# Altium PCB CalcPCB_Project.PcbDoc
Units mil, origin at the board's own origin, x right, y up, seen from the top; angles counter-clockwise.
Board outline 3071.38 x 4608.28 mil, 2 copper layers (Top Layer, Bottom Layer); 35 components, 37 nets, 160 pads, 80 vias.
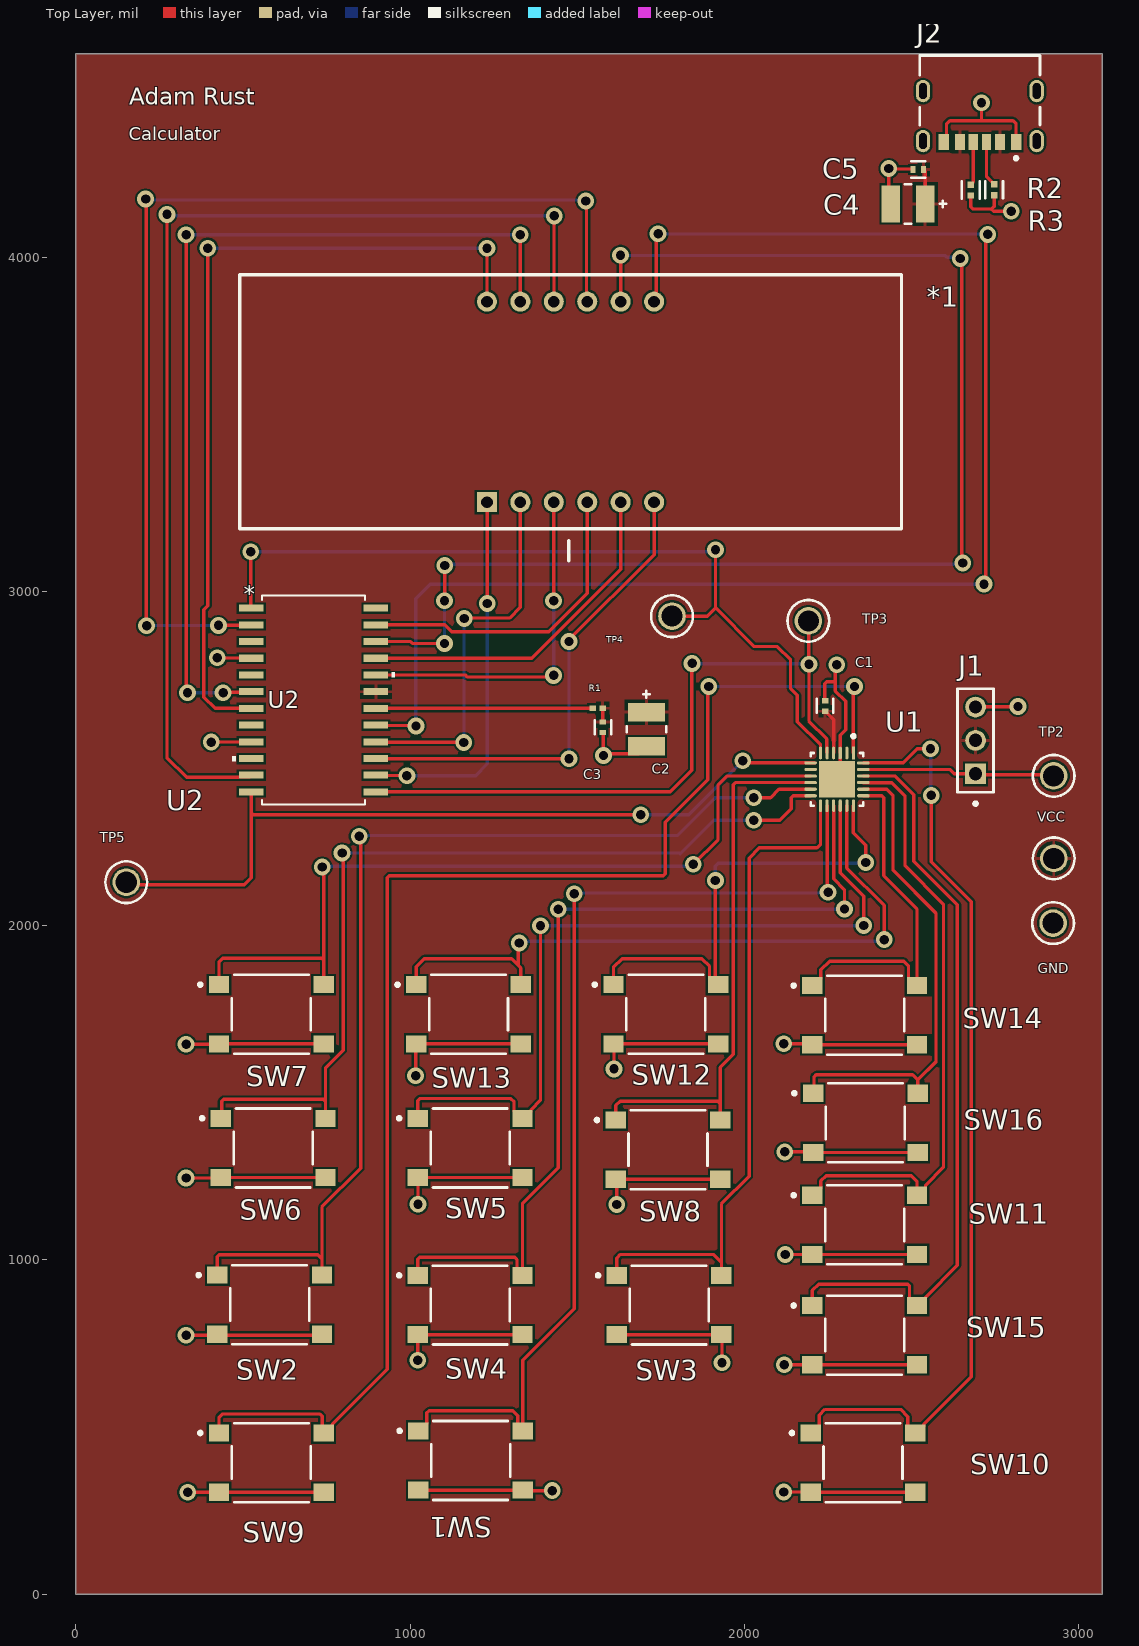
[diagram p0: Top Layer view]
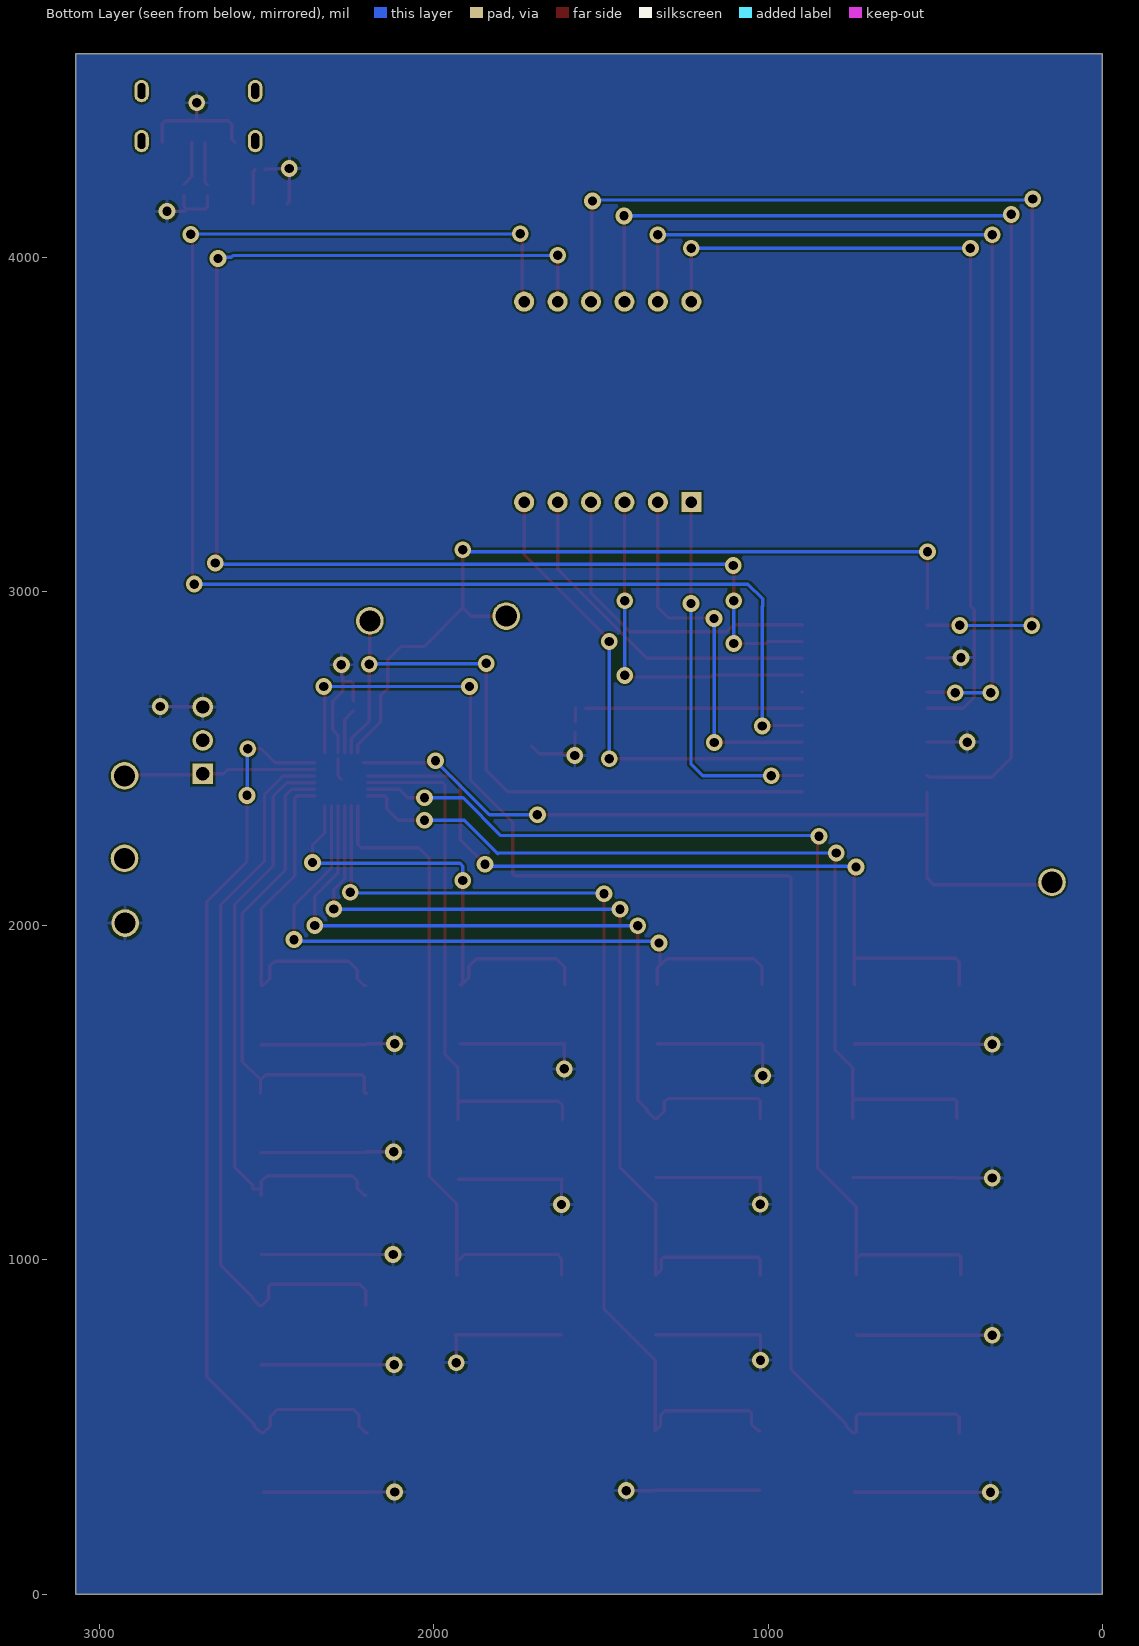
[diagram p1: Bottom Layer view, seen from below]
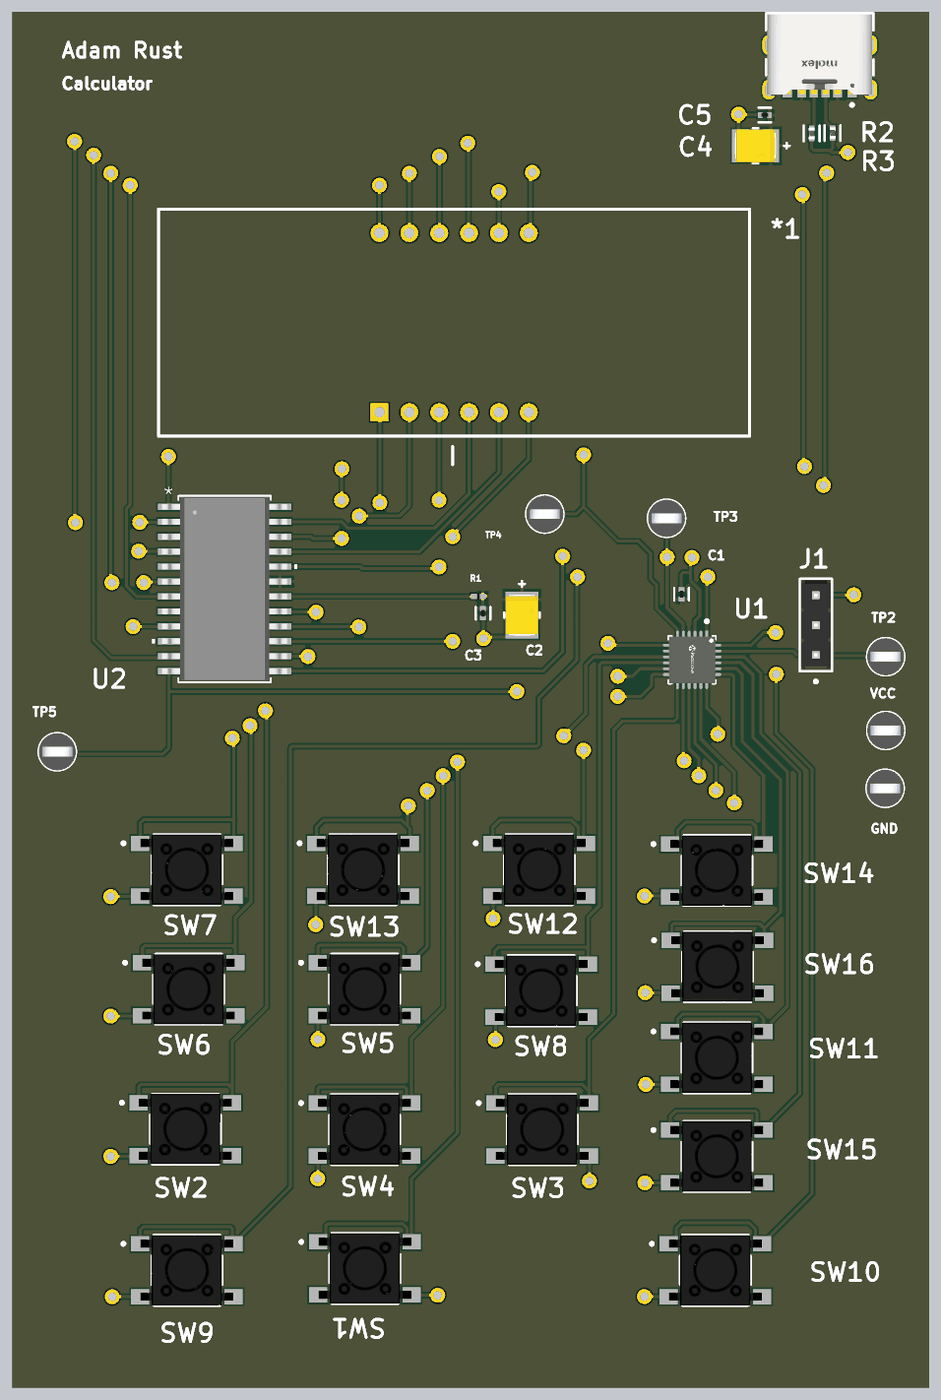
[diagram p2: 3D render of the assembled board from above, using the file's embedded part models]

## Layer stack, top to bottom
Top Solder: solder mask 0.4, Solder Resist, Dk 3.5
Top Layer: signal copper 1.4
Dielectric 1: dielectric 12.6, FR-4, Dk 4.8
Bottom Layer: signal copper 1.4
Bottom Solder: solder mask 0.4, Solder Resist, Dk 3.5

## Board outline
0,0 0,4608.28 3071.38,4608.28 3071.38,0

## Design rules (kind name [scope] priority, off if disabled: settings)
Clearance [All] p1: gap=6 ignorepadtopadclearanceinfootprint=FALSE
MinimumSolderMaskSliver [All] p1: minsoldermaskwidth=4
PolygonConnect [All] p1: connectstyle=Relief reliefconductorwidth=10 reliefentries=4 polygonreliefangle="90 Angle" airgapwidth=10
RoutingVias [All] p1: holewidth=28 width=50 viastyle="Through Hole" minholewidth=28 minwidth=50 maxholewidth=28 maxwidth=50
SilkToSolderMaskClearance [IsPad] p1: minsilkscreentomaskgap=4 clearancetoexposedcopper=TRUE
SolderMaskExpansion [All] p1: expansion=4 istentingtop=FALSE
SupplyNets "Schematic Supply Nets" [InNet('GND')] p1: voltage=0.000
Width [All] p1: maxlimit=10 minlimit=10 preferedwidth=10
28 further rules are at their usual default settings.

## Classes and differential pairs
component class MAX_7SEG_USBC: *1 C2 C3 C4 C5 J2 R1 R2 R3 U2
component class Calc_Schem: C1 GND J1 SW1 SW2 SW3 SW4 SW5 SW6 SW7 SW8 SW9 SW10 SW11 SW12 SW13 SW14 SW15 SW16 TP2 TP3 TP4 TP5 U1 VCC

## Components (designator, comment, footprint, x,y, rotation, side; value= is the part's Value field where it differs from the comment)
*1 "7SEG_4DIGIT" PCBComponent_1 1230,3266.93 r0 top
C1 "GRM155R71C104KA88D" FP-GRM15-MFG 2241.79,2657.39 r90 top value=0.10μF
C2 "TAJB106K010RNJ" FP-TAJB-MFG 1707.08,2587.74 r90 top
C3 "GRM155R71C104KA88D" FP-GRM15-MFG 1576.8,2593.78 r270 top value=0.10μF
C4 "TAJB106K010RNJ" FP-TAJB-MFG 2489.59,4159.2 r0 top
C5 "GRM155R71C104KA88D" FP-GRM15-MFG 2520.48,4262.14 r0 top value=0.10μF
GND "BTN" KSTN-5011_V 2923.7,2007.73 r0 top (schematic designator TP6)
J1 "22-28-4030" FP-22-28-4030-MFG 2691.59,2554.12 r90 top
J2 "217175-0001" FP-217175-0001-MFG 2704.6,4463.27 r180 top
R1 "RC0402FR-0710KL" RESC1005X40X25LL05T10 1561.37,2650.42 r0 top
R2 "5.1K" FP-RN73R1E-IPC_C 2747.44,4201.58 r270 top
R3 "5.1K" FP-RN73R1E-IPC_C 2677.46,4200.66 r270 top
SW1 "PTS645SM43SMTR92LFS" FP-PTS645SM43SMTR92LFS-MFG 1181.1,400 r0 top locked
SW2 "PTS645SM43SMTR92LFS" FP-PTS645SM43SMTR92LFS-MFG 580,866.14 r0 top locked
SW3 "PTS645SM43SMTR92LFS" FP-PTS645SM43SMTR92LFS-MFG 1775,865 r0 top locked
SW4 "PTS645SM43SMTR92LFS" FP-PTS645SM43SMTR92LFS-MFG 1180,865 r0 top locked
SW5 "PTS645SM43SMTR92LFS" FP-PTS645SM43SMTR92LFS-MFG 1180,1335 r0 top locked
SW6 "PTS645SM43SMTR92LFS" FP-PTS645SM43SMTR92LFS-MFG 590.55,1335 r0 top locked
SW7 "PTS645SM43SMTR92LFS" FP-PTS645SM43SMTR92LFS-MFG 585,1735 r0 top locked
SW8 "PTS645SM43SMTR92LFS" FP-PTS645SM43SMTR92LFS-MFG 1771.65,1330 r0 top locked
SW9 "PTS645SM43SMTR92LFS" FP-PTS645SM43SMTR92LFS-MFG 585,393.7 r0 top locked
SW10 "PTS645SM43SMTR92LFS" FP-PTS645SM43SMTR92LFS-MFG 2355,393.7 r0 top
SW11 "PTS645SM43SMTR92LFS" FP-PTS645SM43SMTR92LFS-MFG 2360,1105 r0 top
SW12 "PTS645SM43SMTR92LFS" FP-PTS645SM43SMTR92LFS-MFG 1765,1735 r0 top locked
SW13 "PTS645SM43SMTR92LFS" FP-PTS645SM43SMTR92LFS-MFG 1175,1735 r0 top locked
SW14 "PTS645SM43SMTR92LFS" FP-PTS645SM43SMTR92LFS-MFG 2360,1732.28 r0 top
SW15 "PTS645SM43SMTR92LFS" FP-PTS645SM43SMTR92LFS-MFG 2360,775 r0 top
SW16 "PTS645SM43SMTR92LFS" FP-PTS645SM43SMTR92LFS-MFG 2362.2,1410 r0 top
TP2 "BTN" KSTN-5011_V 2925.44,2448.32 r0 top
TP3 "BTN" KSTN-5011_V 2191.54,2911.84 r0 top
TP4 "BTN" KSTN-5011_V 1783.65,2925.86 r0 top
TP5 "BTN" KSTN-5011_V 150.96,2129.92 r0 top
U1 "ATTINY1617-MNR" FP-C04-21386-IPC_A 2277.1,2437.74 r270 top
U2 "MAX7219CWG+T" 21-0042B_24_MXM 711.31,2675 r0 top
VCC "BTN" KSTN-5011_V 2925.7,2201.34 r0 top (schematic designator TP1)

## Footprints (in the part's own frame and the unit in brackets; to place one, negate y for a bottom-side part, rotate by r counter-clockwise, add the part's x,y. Pads: shape width x height; smd on the part's side, far side on the other; paste and mask are expansions set on the pad)
21-0042B_24_MXM [mil]
  rect 73.78x20.97 smd paste+0 mask+0: 1(-186.39,275) 2(-186.39,225) 3(-186.39,175) 4(-186.39,125) 5(-186.39,75) 6(-186.39,25) 7(-186.39,-25) 8(-186.39,-75) 9(-186.39,-125) 10(-186.39,-175) 11(-186.39,-225) 12(-186.39,-275) 13(186.39,-275) 14(186.39,-225) 15(186.39,-175) 16(186.39,-125) 17(186.39,-75) 18(186.39,-25) 19(186.39,25) 20(186.39,75) 21(186.39,125) 22(186.39,175) 23(186.39,225) 24(186.39,275)
  silkscreen extent -243,-312 243,312, body extent -209,-307 209,307, height 104
FP-22-28-4030-MFG [mm]
  rect 1.57x1.57 hole 1.02 paste-2539.97 mask+0: 1(-2.54,0)
  round 1.57 hole 1.02 paste-2539.97 mask+0: 2(0,0) 3(2.54,0)
  silkscreen extent -4.92,-1.37 3.94,1.37, body extent -4.04,-1.47 4.04,1.47, height 0.25
FP-217175-0001-MFG [mm]
  rrect100% 1.1x1.7 hole 1.2 slot 0.6 at 0 deg paste-2539.97 mask+0: 1(-4.32,2.95) 2(4.32,2.95) 3(-4.32,-0.85) 4(4.32,-0.85)
  rect 0.7x1.2 smd paste+0 mask+0: A5(-0.5,3.03) B5(0.5,3.03)
  rect 0.76x1.2 smd paste+0 mask+0: A9(1.52,3.03) B9(-1.52,3.03)
  rect 0.8x1.2 smd paste+0 mask+0: A12(2.75,3.03) B12(-2.75,3.03)
  silkscreen extent -4.57,-3.55 4.57,4.37, body extent -4.97,-3.65 4.97,3.9, height 0.25
FP-C04-21386-IPC_A [mm]
  rect 0.954x0.239 smd paste+0 mask+0: 1(-2.002,1.25)
  rrect100% 0.954x0.239 smd paste+0 mask+0: 2(-2.002,0.75) 3(-2.002,0.25) 4(-2.002,-0.25) 5(-2.002,-0.75) 6(-2.002,-1.25) 13(2.002,-1.25) 14(2.002,-0.75) 15(2.002,-0.25) 16(2.002,0.25) 17(2.002,0.75) 18(2.002,1.25)
  rrect100% 0.239x0.954 smd paste+0 mask+0: 7(-1.25,-2.002) 8(-0.75,-2.002) 9(-0.25,-2.002) 10(0.25,-2.002) 11(0.75,-2.002) 12(1.25,-2.002) 19(1.25,2.002) 20(0.75,2.002) 21(0.25,2.002) 22(-0.25,2.002) 23(-0.75,2.002) 24(-1.25,2.002)
  rect 2.75x2.75 smd paste-1000 mask+0: 25(0,0)
  silkscreen extent -3.4,-2 2,2, body extent -2.98,-2.98 2.98,2.98, height 0.25
FP-GRM15-MFG [mm]
  rect 0.4x0.5 smd paste+0 mask+0: 1(-0.4,0) 2(0.4,0)
  silkscreen extent -0.53,-0.63 0.53,0.63, body extent -0.7,-0.38 0.7,0.38, height 0.25
FP-PTS645SM43SMTR92LFS-MFG [mm]
  rect 1.55x1.3 smd paste+0 mask+0: 1(-3.975,2.25) 2(3.975,2.25) 3(-3.975,-2.25) 4(3.975,-2.25)
  silkscreen extent -5.52,-3 3,3, body extent -4.85,-3.1 4.85,3.1, height 0.25
FP-RN73R1E-IPC_C [mil]
  rect 19.2x18.6 smd paste+0 mask+0: 1(-16.3,0) 2(16.3,0)
  silkscreen extent -26,-27 26,27, body extent -30,-15 30,15, height 10
FP-TAJB-MFG [mm]
  rect 1.4x2.8 smd paste+0 mask+0: 1(-1.3,0) 2(1.3,0)
  silkscreen extent -0.23,-1.5 2.9,1.5, body extent -2.1,-1.6 2.1,1.6, height 0.25
KSTN-5011_V [mm] "Test Point, Dia 3.17mm"
  round 2.1 hole 1.6: 1(0,0)
  silkscreen extent -1.59,-1.58 1.59,1.58, body extent -1.59,-1.59 1.59,1.59, height 8.13
PCBComponent_1 [mil]
  rect 60x60 hole 35: 1(0,0)
  round 60 hole 35: 2(100,0) 3(200,0) 4(300,0) 5(400,0) 6(500,0) 7(500,600) 8(400,600) 9(300,600) 10(200,600) 11(100,600) 12(0,600)
  silkscreen extent -740,-175 1240,680
RESC1005X40X25LL05T10 [mm] "Chip Resistor, 2-Leads, Body 1.00x0.50mm, IPC High Density"
  rect 0.5x0.45 smd: 1(-0.375,0) 2(0.375,0)
  body extent -0.53,-0.27 0.53,0.28, height 0.4

## Part data
*1: "4 Digit 7 Segment Common Cathode Display"
C1 C3 C5: library part CMP-2100-03641-2, "CAP CER 0.1UF 16V X7R 0402", Capacitance=0.10μF, Manufacturer=Murata, Package=GRM15, Temperature="-55°C to +125°C", Temperature Characteristic=X7R, Temperature Range High=+125°C, Temperature Range Low=-55°C, Tolerance=10%, Voltage Rating=16Vdc, Category=Cap, ComponentLink2Description=Datasheet, ComponentLink2URL=https://search.murata.co.jp/Ceramy/image/img/A01X/G101/ENG/GRM155R71H471KA01-01A.pdf, Device Class L1="Passive Components", Device Class L2=Capacitors, Device Class L3="Ceramic Capacitors", Digikey Description="CAP CER 0.1UF 16V X7R 0402", Height=0.55mm, Ipc Land Pattern Name=CAPC10050X219, Lead Free=yes, Manufacturer Part Number=GRM155R71C104KA88D, Material=Ceramic, Mouser Description="0402 0.1 uF 16V ±10 % Tolerance X7R SMT Multilayer Ceramic Capacitor", Octopart=https://octopart.com/grm155r71c104ka88d-murata-196880, RoHS=TRUE, Standoff Height=0mm
C2 C4: library part CMP-04424-000573-1, "10uF 10V  ±10% 2.1Ω 1210  SMD Tantalum Capacitor", Capacitance=10uF, Case Code (Imperial)=1210, Case Code (Metric)=3528, Dielectric Material=Tantalum, ESR (Equivalent Series Resistance)=2.5R, Leakage Current=1uA, Max Operating Temperature=125°C, Min Operating Temperature=-55°C, Package Quantity=2000, Tolerance=10%, Voltage=10V, Case/Package=1210, Depth=2.8mm, Dissipation Factor=6%, Features="General Purpose", Height=1.9mm, Height - Seated (Max)=0.083inch, Lead Free="Lead Free", Length=3.5mm, Mount="Surface Mount", Packaging="Tape and Reel", Polarity=Polar, Q Factor=6, Radiation Hardening=No, REACH SVHC="No SVHC", RoHS Compliant=Yes, Series=TAJ, Termination=SMD/SMT, Voltage Rating=10V, Voltage Rating (DC)=10V, Width=2.8mm
GND TP2 TP3 TP4 TP5 VCC: library part CMP-1672-00003-4, "Test Point, Black, Through Hole, RoHS, Bulk", Colour=Black, Manufacturer=Keystone, Package Quantity=100, ComponentLink1Description="Manufacturer URL", ComponentLink1URL=http://www.keyelco.com/, ComponentLink2Description=Datasheet, ComponentLink2URL=http://www.keyelco.com/product-pdf.cfm?p=1320, Contact Material=Bronze, Contact Plating=Silver, DatasheetVersion="Rev. F, 12/2013", Height="8.12 mm", Mount="Through Hole", Mounting Technology="Through Hole", PackageDescription="1-Pin Through Hole Device, Dia 3.17 mm", PackageReference=5011, Packaging=Bulk, Pins=1, REACH SVHC="No SVHC", RoHSCompliant=true
J1: library part CMP-04776-000098-1, "UPDI PROG", Current Rating=4A, Manufacturer=Molex, Temperature="-40°C to +80°C", Temperature Range High=+80°C, Temperature Range Low=-40°C, Voltage Rating=500V, Automotive=No, Category=Conn, ComponentLink2Description=Datasheet, ComponentLink2URL=https://www.molex.com/webdocs/datasheets/pdf/en-us/0022284030_PCB_HEADERS.pdf, Conn Gender=Male, Conn Orientation=Vertical, Contact Material=Gold,Nickel, Device Class L1=Connectors, Device Class L2="Headers and Wire Housings", Device Class L3=unset, Digikey Description="CONN HEADER VERT 3POS 2.54MM", Footprint Url=https://www.molex.com/pdm_docs/sd/022284030_sd.pdf, Height=8.88mm, Lead Free=Yes, Manufacturer Part Number=22-28-4030, Mouser Description="Headers & Wire Housings 3P VERT HEADER Sn", Number Of Contacts=3, Number Of Rows=1, Octopart=https://octopart.com/0022284030-molex-10476094, Package=22-28-4030, Pitch=2.54mm, RoHS=TRUE
J2: library part CMP-04767-000026-1, "CONN RCP USB2.0 C 6+18P SMD RA"
R1: library part CMP-2002-07353-1, Manufacturer="Yageo / Phycomp", Part Number=RC0402FR-0710KL
R2 R3: library part CMP-04015-008529-1, "5.1kΩ ±1% 0.063W, 1/16W Chip Resistor 0402 (1005 Metric) Moisture Resistant Thin Film"
SW1 SW2 SW3 SW4 SW5 SW6 SW7 SW8 SW9 SW10 SW11 SW12 SW13 SW14 SW15 SW16: library part CMP-2000-05160-2, "SWITCH TACTILE SPST-NO 0.05A 12V", Case/Package=SMD/SMT, Color=Black, Contact Resistance=100mR, Current Rating=50mA, Max Operating Temperature=60°C, Max Voltage Rating (DC)=12V, Min Operating Temperature=-20°C, Operating Force=160gf, Package Quantity=1, Actuator Length=0.85mm, Actuator Material=Nylon, Actuator Type=Standard, Contact Material=Silver, Contact Plating=Silver, Depth=9mm, Illumination Type=Non-Illuminated, Lead Free="Lead Free", Length=6mm, Max Current Rating=50mA, Mechanical Life=100000Cycles, Mount="Surface Mount", Orientation=Straight, Packaging="Tape and Reel", REACH SVHC="No SVHC", Switch Function=Off-Mom, Termination="Gull Wing", Throw Configuration=SPST, Voltage Rating (DC)=12V
U1: library part CMP-06276-000207-1, "IC MCU 8BIT 16KB FLASH 24VQFN", Case/Package=VQFN, Frequency=20MHz, Max Operating Temperature=105°C, Min Operating Temperature=-40°C, Core Architecture=AVR, Interface=I2C, Memory Size=16KB, Memory Type=FLASH, Number of I/Os=22, Oscillator Type=Internal, Packaging="Tape and Reel", Peripherals="Brown-out Detect/Reset", RoHS Compliant=Yes
U2: "Serially Interfaced, 8-Digit, LED Display Drivers", Manufacturer_Name="Analog Devices Inc", Copyright="Copyright (C) 2026 Ultra Librarian. All rights reserved.", Manufacturer_Part_Number=MAX7219CWG+T, RefDes=RefDes, Type=Type

## Via types
v1: diameter 50, hole 28, Top Layer to Bottom Layer, 80 vias

## Nets (pads, with @x,y where several pads share a name; then routed paths per layer and width w, separated by ;. In a path a pad name is that pad's centre, name@x,y a point inside that pad or via, vN(x,y) a via of type N, cw(c..) or ccw(c..) an arc to the next point about the centre after c; other vN are vias at no path point)
BUTTON-: SW11.1 SW11.2 U1.21 | length 1809.8
  Top Layer w10: SW11.1 2208.43,1193.58 2229.02,1214.17 2229.02,1236.22 2244.9,1252.1 2499.34,1252.1 2513.02,1238.42 2516.5,1234.95 SW11.2@2516.5,1212.38 ; U1.21 2440.57,2427.89 2480.76,2387.71 2480.76,2179.37 2595.76,2064.38 2595.76,1277.5 2542.01,1223.75 2542.01,1214.17 2540.22,1212.38 SW11.2@2516.5,1212.38 ; SW11.2 SW11.2@2516.5,1212.38
BUTTON-0: SW1.1 SW1.2 U1.14 | length 3092.3
  Top Layer w10: SW1.1 1029.53,488.58 1050.12,509.17 1050.12,542.39 1056.67,548.94 1307.35,548.94 1322.39,533.9 1322.39,503.79 SW1.2 1337.6,700.2 1491.22,853.82 v1(1491.22,2095.79) ; U1.14 2247.58,2102.73 v1(2250.56,2099.74)
  Bottom Layer w10: v1(1491.22,2095.79) 1493.2,2097.77 2248.58,2097.77 v1(2250.56,2099.74)
BUTTON-1: SW2.1 SW2.2 U1.11 | length 3144.9
  Top Layer w10: SW2.1 423.5,1009.35 429.36,1015.21 724.52,1015.21 735.8,1003.93 ; SW2.2 736.5,1158.55 852.44,1274.5 852.44,2262.93 v1(848.08,2267.29) ; v1(2028.27,2382.77) 2078.36,2382.77 2103.61,2408.02 U1.11@2198.28,2408.02
  Bottom Layer w10: v1(848.08,2267.29) 850.38,2269.59 1799.64,2269.59 1912.83,2382.77 v1(2028.27,2382.77)
BUTTON-2: SW4.1 SW4.2 U1.15 | length 2723.6
  Top Layer w10: SW4.1 1023.5,1001.83 1029.36,1007.69 1313.62,1007.69 1319.88,1001.42 1319.88,970.19 SW4.2 1336.5,1169.1 1443.2,1275.8 v1(1443.2,2049.48) ; U1.15 2267.26,2139.82 2299.64,2107.45 v1(2299.64,2049.72)
  Bottom Layer w10: v1(1443.2,2049.48) 1443.31,2049.6 2299.52,2049.6 v1(2299.64,2049.72)
BUTTON-3: SW3.1 SW3.2 U1.13 | length 2008.5
  Top Layer w10: SW3.1 1618.5,1005.49 1629.48,1016.46 1907.73,1016.46 1931.5,992.7 ; SW3.2 1931.5,992.7 ; U1.13 2227.89,2243.4 2217.48,2232.99 2044.89,2232.99 2014.3,2202.4 2014.3,1250.25 1931.5,1167.45 1931.5,992.7
BUTTON-4: SW6.1 SW6.2 U1.12 | length 2678.5
  Top Layer w10: SW6.1 436.23,1425.76 436.23,1474.37 442.09,1480.22 740.81,1480.22 747.05,1473.99 ; SW6.2 747.05,1473.99 ; v1(796.63,2217.55) 800.06,2214.12 800.06,1627.67 747.05,1574.65 747.05,1473.99 ; v1(2028.22,2315.44) 2106.21,2315.44 2140.71,2349.94 2140.71,2382.67 2146.57,2388.52 U1.12
  Bottom Layer w10: v1(796.63,2217.55) 1805.93,2217.55 1808.37,2215.11 1908.7,2315.44 v1(2028.22,2315.44)
BUTTON-5: SW5.1 SW5.2 U1.16 | length 2365.7
  Top Layer w10: SW5.1 1023.5,1476.87 1029.36,1482.73 1301.08,1482.73 1310.98,1472.83 1310.98,1444.17 1331.57,1423.58 SW5.2 1341.42,1423.58 1362.01,1444.17 1362.01,1449.09 1390.03,1477.12 v1(1390.03,1999.75) ; U1.16 2286.95,2157.78 2356.87,2087.85 v1(2356.87,2000.51)
  Bottom Layer w10: v1(1390.03,1999.75) 1390.41,2000.13 2356.49,2000.13 v1(2356.87,2000.51)
BUTTON-6: SW8.1 SW8.2 U1.10 | length 1618.4
  Top Layer w10: SW8.1 1615.16,1462.14 1628.22,1475.21 1920.27,1475.21 1928.15,1467.33 ; SW8.2 1928.15,1467.33 ; U1.10@2198.28,2428.23 1973.52,2428.23 1967.01,2421.72 1967.01,1614.61 1928.15,1575.76 1928.15,1467.33
BUTTON-7: SW7.1 SW7.2 U1.9 | length 2412.3
  Top Layer w10: SW7.1 428.5,1891.55 439.57,1902.62 736.21,1902.62 ; 736.25,1902.66 736.21,1902.62 ; v1(737.14,2175.38) 742.06,2170.46 742.06,1896.76 ; SW7.2 742.06,1824.15 742.06,1896.76 ; v1(1847.1,2183.31) 1921.39,2257.6 1921.39,2421.04 1947.93,2447.58 U1.9 ; 736.21,1902.62 742.06,1896.76
  Bottom Layer w10: v1(737.14,2175.38) 739.32,2177.55 1841.34,2177.55 v1(1847.1,2183.31)
BUTTON-8: SW13.1 SW13.2 U1.17 | length 2049.1
  Top Layer w10: SW13.1 1018.5,1876.99 1042.88,1901.37 1303.59,1901.37 1323.59,1881.37 ; v1(1326.58,1948.3) 1323.59,1945.31 1323.59,1881.37 ; SW13.2 1331.5,1873.46 1323.59,1881.37 ; U1.17 2306.63,2172.32 2418.5,2060.45 v1(2418.5,1958.38)
  Bottom Layer w10: v1(1326.58,1948.3) 1331.62,1953.34 2413.46,1953.34 v1(2418.5,1958.38)
BUTTON-9: SW12.1 SW12.2 U1.18 | length 1425.2
  Top Layer w10: SW12.1 1608.5,1875.38 1634.49,1901.37 1872.64,1901.37 1895.98,1878.02 1895.98,1844.17 1916.57,1823.58 SW12.2 1913.47,1831.61 v1(1913.47,2135.09) ; U1.18 2326.34,2277.72 2363.26,2240.8 v1(2363.26,2188.92)
  Bottom Layer w10: v1(1913.47,2135.09) 1913.47,2178.46 1921.95,2186.95 2361.29,2186.95 v1(2363.26,2188.92)
BUTTON-+: SW15.1 SW15.2 U1.22 | length 2223.9
  Top Layer w10: SW15.1 2203.5,908.64 2222.34,927.47 2488.47,927.47 2494.32,921.62 2494.32,884.17 2514.91,863.58 SW15.2 2521.42,863.58 2542.01,884.17 2542.01,889.09 2637.32,984.4 2637.32,2062.1 2507.04,2192.38 2507.04,2392.31 2451.77,2447.58 U1.22
BUTTON-=: SW10.1 SW10.2 U1.24 | length 2795.1
  Top Layer w10: SW10.1 2203.43,482.28 2224.02,502.87 2224.02,535.58 2241.14,552.71 2468,552.71 2489.31,531.4 2489.31,502.87 2509.9,482.28 SW10.2 2516.42,482.28 2537.01,502.87 2537.01,507.8 2679.18,649.97 2679.18,2071.7 2559.24,2191.65 v1(2559.24,2389.68) ; U1.24 2475.21,2486.95 2517.12,2528.86 v1(2556.97,2528.86)
  Bottom Layer w10: v1(2556.97,2528.86) 2558.1,2527.73 2558.1,2390.81 v1(2559.24,2389.68)
BUTTON-CLR: SW9.1 SW9.2 U1.1 | length 4245
  Top Layer w10: SW9.1 428.5,529.93 437.49,538.92 730.78,538.92 737.05,532.65 737.05,486.73 SW9.2 746.42,482.28 767.01,502.87 767.01,507.8 931.96,672.74 931.96,2142.97 937.81,2148.82 1757.83,2148.82 1763.69,2154.68 1763.69,2309.03 1890.72,2436.06 1890.72,2712.8 v1(1893.42,2715.51) ; U1.1 2326.34,2712.14 v1(2329.71,2715.51)
  Bottom Layer w10: v1(1893.42,2715.51) v1(2329.71,2715.51)
BUTTON-x: SW16.1 SW16.2 U1.20 | length 1438.1
  Top Layer w10: SW16.1@2200.79,1498.58 SW16.1 2208.55,1501.42 2208.55,1548.32 2214.41,1554.17 2503.1,1554.17 2518.7,1538.57 ; U1.20 2425.69,2408.21 2444.8,2389.1 2444.8,2165.16 2573.37,2036.59 2573.37,1593.24 2518.7,1538.57 ; SW16.2 2518.7,1538.57
BUTTON/: SW14.1 SW14.2 U1.19 | length 1077.6
  Top Layer w10: SW14.1 2208.43,1820.87 2229.02,1841.46 2229.02,1867.94 2254.92,1893.85 2476.78,1893.85 2490.98,1879.64 2490.98,1841.46 2511.57,1820.87 SW14.2 2516.5,2049.97 2416.57,2149.89 2416.57,2382.67 2410.71,2388.52 U1.19
DIG_1: *1.9 U2.2 | length 3214.1
  Top Layer w10: v1(208.78,4173.92) 210.27,4172.44 210.27,2898.97 v1(211.76,2897.48) ; v1(426.92,2898.22) 427.8,2899.11 524.03,2899.11 U2.2 ; v1(1525.68,4167.99) 1527.84,4165.83 1527.84,3869.09 *1.9
  Bottom Layer w10: v1(208.78,4173.92) 211.75,4170.96 1522.72,4170.96 v1(1525.68,4167.99) ; v1(211.76,2897.48) 212.13,2897.85 426.54,2897.85 v1(426.92,2898.22)
DIG_2: *1.10 U2.11 | length 3320.9
  Top Layer w10: v1(272.8,4127.76) 272.8,2502.74 331.28,2444.26 487.17,2444.26 487.43,2444.51 519.44,2444.51 U2.11 ; *1.10 1430.64,3867.57 1430.64,4122.64 v1(1431.27,4123.28)
  Bottom Layer w10: v1(272.8,4127.76) 277.28,4123.28 v1(1431.27,4123.28)
DIG_3: *1.11 U2.6 | length 2764.5
  Top Layer w10: v1(330,4066.93) 330,2700.51 v1(334.04,2696.47) ; v1(440.65,2696.47) 442.41,2698.24 523.16,2698.24 U2.6 ; *1.11 v1(1330,4066.93)
  Bottom Layer w10: v1(330,4066.93) v1(1330,4066.93) ; v1(334.04,2696.47) v1(440.65,2696.47)
DIG_4: *1.12 U2.7 | length 2498.8
  Top Layer w10: v1(395,4026.93) 395,2957.23 383.22,2945.44 383.22,2683.69 416.9,2650 U2.7 ; *1.12 v1(1230,4026.93)
  Bottom Layer w10: v1(395,4026.93) v1(1230,4026.93)
GND: C1.2 C2.1 C3.2 C4.1 C5.1 GND.1 J1.3 J2.A12 J2.B12 R2.2 R3.2 SW1.3 SW1.4 SW2.3 SW2.4 SW3.3 SW3.4 SW4.3 SW4.4 SW5.3 SW5.4 SW6.3 SW6.4 SW7.3 SW7.4 SW8.3 SW8.4 SW9.3 SW9.4 SW10.3 SW10.4 SW11.3 SW11.4 SW12.3 SW12.4 SW13.3 SW13.4 SW14.3 SW14.4 SW15.3 SW15.4 SW16.3 SW16.4 U1.3 U1.25 U2.4 U2.9 | length 8169.8
  Top Layer w10: v1(330,775) 733.94,775 SW2.4 ; v1(330,1245) 432.64,1245 SW6.3 SW6.4 ; v1(330,1645) 427.09,1645 SW7.3 428.55,1646.37 741.45,1646.37 SW7.4 ; v1(335,305) 741.38,305 SW9.4 ; v1(404.85,2549.21) 405.25,2549.6 524.53,2549.6 U2.9 ; v1(423.22,2801.79) 424.11,2800.89 524.02,2800.89 U2.4 ; v1(1016.56,1550.95) 1016.56,1644.48 SW13.3 SW13.4 ; v1(1023.19,700.15) 1023.19,776.1 SW4.3 SW4.4 ; v1(1023.85,1166.63) 1023.85,1246.07 SW5.3 SW5.4 ; SW1.3 SW1.4 1339.02,310 v1(1425,310) ; C3.2 1577.81,2577.03 1577.81,2510.07 v1(1578.81,2509.06) 1583.75,2514 1684.52,2514 C2.1 ; v1(1610.27,1571.49) 1610.27,1644.65 SW12.3 SW12.4 ; v1(1618.22,1165.97) 1618.22,1238.35 SW8.3 SW8.4 ; SW3.3 SW3.4 1936.42,776.42 1933.11,773.11 v1(1933.11,692.82) ; v1(2117.66,305.71) 2197.91,305.71 SW10.3 SW10.4 ; v1(2117.66,1646.81) 2200.39,1646.81 SW14.3 SW14.4 ; v1(2119.17,686.52) 2203.4,686.52 SW15.3 SW15.4 ; v1(2120.67,1323.2) 2203.92,1323.2 SW16.3 SW16.4 ; v1(2122.18,1016.15) 2203.24,1016.15 SW11.3 SW11.4 ; C1.2 2240.83,2674.1 2240.83,2724.07 2246.69,2729.93 2271.65,2729.93 2272.29,2730.57 ; v1(2276.79,2780.34) 2272.29,2775.84 2272.29,2730.57 ; U1.25 2286.97,2447.6 U1.3@2286.97,2500.81 ; U1.3 2287.01,2516.62 2287.01,2569.67 2303.02,2585.67 2303.02,2671.28 2272.29,2702 2272.29,2730.57 ; C4.1 2432.42,4165.18 v1(2432.42,4264.98) 2433.84,4263.56 2502.61,4263.56 C5.1@2504.38,4261.79 ; J2.A12 2604.66,4352.31 2604.66,4398.01 2615.06,4408.4 2709.43,4408.4 ; R3.2 2677.46,4150.62 2684.32,4143.75 2739.79,4143.75 2743.62,4147.58 2747.44,4151.4 R2.2 ; J1.3 2692.32,2654.85 2817.93,2654.85 v1(2818.66,2655.58) ; v1(2709.43,4461.62) 2709.43,4408.4 ; 2739.29,4143.75 2746.15,4136.89 v1(2798.7,4136.89) ; J2.B12 2812.87,4399.34 2803.81,4408.4 2709.43,4408.4
NetJ2_A5: J2.A5 R2.1 | length 135.7
  Top Layer w10: J2.A5 2724.28,4241.34 2747.44,4218.19 R2.1
NetJ2_B5: J2.B5 R3.1 | length 130.1
  Top Layer w10: R3.1 2677.46,4217.26 2684.91,4224.72 J2.B5
NetR1_1: R1.1 U2.18 | length 649.1
  Top Layer w10: U2.18 897.91,2650.21 1546.39,2650.21 R1.1
SEG_A: *1.1 U2.14 | length 1131.9
  Top Layer w10: U2.14 898.26,2449.44 989.97,2449.44 v1(990.53,2448.87) ; *1.1 1231.09,3265.84 v1(1231.09,2963.84)
  Bottom Layer w10: v1(990.53,2448.87) 1196.2,2448.87 1231.09,2483.76 v1(1231.09,2963.84)
SEG_B: *1.2 U2.16 | length 1131.6
  Top Layer w10: U2.16 898.7,2549 1159.98,2549 v1(1160.98,2548) ; v1(1162.18,2919.12) 1163.39,2920.33 1297.58,2920.33 1330,2952.75 *1.2
  Bottom Layer w10: v1(1160.98,2548) 1161.58,2548.61 1161.58,2918.51 v1(1162.18,2919.12)
SEG_C: *1.3 U2.20 | length 1054.7
  Top Layer w10: U2.20 1165.61,2750 1171.78,2743.83 1424.5,2743.83 v1(1429.34,2748.67) ; v1(1429.34,2972.31) 1429.67,2972.64 1429.67,3266.6 *1.3
  Bottom Layer w10: v1(1429.34,2748.67) v1(1429.34,2972.31)
SEG_D: *1.4 U2.23 | length 961.2
  Top Layer w10: U2.23 1103.69,2900 1124.57,2879.12 1414.73,2879.12 1530,2994.39 *1.4
SEG_DP: *1.8 U2.22 | length 4067.8
  Top Layer w10: U2.22 1001.37,2850 1007.2,2844.17 v1(1102.95,2844.17) ; v1(1102.95,2972.31) 1103.54,2972.9 1103.54,3076.88 v1(1104.14,3077.47) ; v1(1629.64,4005.73) 1629.82,4005.55 1629.82,3867.11 *1.8 ; v1(2646.12,3995.99) 2649.96,3992.16 2649.96,3088.98 v1(2653.79,3085.14)
  Bottom Layer w10: v1(1102.95,2844.17) v1(1102.95,2972.31) ; v1(1104.14,3077.47) 1107.97,3081.3 2649.96,3081.3 v1(2653.79,3085.14) ; v1(1629.64,4005.73) 1630.6,4004.77 2601.12,4004.77 2606.12,3999.77 2642.35,3999.77 v1(2646.12,3995.99)
SEG_E: *1.5 U2.21 | length 1043.3
  Top Layer w10: U2.21 1363.89,2800 1630,3066.11 *1.5
SEG_F: *1.6 U2.15 | length 1450.5
  Top Layer w10: U2.15 897.88,2499.82 1475.1,2499.82 v1(1475.28,2499.65) ; v1(1475.28,2850.21) 1475.28,2855.05 1730,3109.77 *1.6
  Bottom Layer w10: v1(1475.28,2499.65) v1(1475.28,2850.21)
SEG_G: *1.7 U2.17 | length 4465.4
  Top Layer w10: U2.17 898.99,2598.71 1016.32,2598.71 v1(1017.61,2597.42) ; *1.7 1735.99,3872.93 1735.99,4063.92 v1(1741.99,4069.91) ; v1(2717.08,3021.85) 2722.44,3027.2 2722.44,4062.64 v1(2727.79,4067.99)
  Bottom Layer w10: v1(1017.61,2597.42) 1017.37,2597.66 1017.37,2955.14 1016.74,2955.76 1016.74,2977.83 1060.64,3021.73 2716.96,3021.73 v1(2717.08,3021.85) ; v1(1741.99,4069.91) 1742.95,4068.95 2726.83,4068.95 v1(2727.79,4067.99)
SPI_CLK: TP3.1 U1.5 U2.13 | length 2061.4
  Top Layer w10: U2.13 897.98,2400.28 1778.61,2400.28 1843.03,2464.7 1843.03,2783.84 v1(1843.76,2784.56) ; TP3.1 2192.48,2910.9 2192.48,2782.6 v1(2193.42,2781.66) 2193.42,2612.07 2247.01,2558.48 U1.5@2247.01,2516.56
  Bottom Layer w10: v1(1843.76,2784.56) 1845.21,2783.11 2191.97,2783.11 v1(2193.42,2781.66)
SPI_CS: TP5.1 U1.7 U2.12 | length 2400.8
  Top Layer w10: TP5.1 158.15,2122.74 504.49,2122.74 524.92,2143.17 524.92,2337.48 ; U2.12 524.92,2337.48 ; v1(1690.4,2331.62) 530.78,2331.62 524.92,2337.48 ; v1(1995.37,2493.18) 2001.6,2486.95 U1.7 U1.7@2211.54,2486.95
  Bottom Layer w10: v1(1690.4,2331.62) 1833.81,2331.62 v1(1995.37,2493.18)
SPI_DIN: TP4.1 U1.6 U2.1 | length 2481.2
  Top Layer w10: v1(523.44,3118.77) 523.44,2951.48 U2.1 ; TP4.1 1888.92,2925.86 1913.82,2950.77 ; v1(1913.82,3124.57) 1913.82,2950.77 ; U1.6 2227.89,2541.1 2158.64,2610.35 2158.64,2689 2138.31,2709.33 2138.31,2795.33 2098.59,2835.05 2029.54,2835.05 1913.82,2950.77
  Bottom Layer w10: v1(523.44,3118.77) 1908.03,3118.77 v1(1913.82,3124.57)
UPDI: J1.1 TP2.1 U1.23 | length 556.3
  Top Layer w10: U1.23 2615.11,2467.26 2628.25,2454.12 J1.1 2694.1,2451.61 TP2.1@2905.78,2451.61
VCC: C1.1 C2.2 C3.1 C4.2 C5.2 J1.2 J2.A9 J2.B9 R1.2 U1.4 U2.19 VCC.1 | length 284.5
  Top Layer w10: U2.19 U2.19@898.98,2698.72 ; R1.2 1576.47,2650.08 1576.47,2609.86 C3.1 ; C1.1 2243.76,2641.64 2246.64,2638.77 2246.64,2636.8 2267.01,2616.42 U1.4@2267.01,2516.56 ; C5.2 2536.23,4260.17 2540.77,4255.64 C4.2
pads on no net: J2.1 J2.2 J2.3 J2.4 U1.2 U1.8 U2.3 U2.5 U2.8 U2.10 U2.24

## Polygon pours and split planes (outlines as drawn)
GND on Bottom Layer "GND" (solid, remove dead copper, pour order 0): 0,0 3071.38,0 3071.38,4608.28 0,4608.28
VCC on Top Layer "5.0V" (solid, remove dead copper, pour order 1): 0,4608.28 3071.38,4608.28 3071.38,0 0,0

## Silkscreen, mask and mechanical layers (free items; w line width, h text height)
Top Overlay:
  text "Adam Rust" at 159.85,4455.45 h50
  text "Calculator" at 159.04,4349.13 h39.37
Mechanical 1:
  lines w3.94: -1.97,0 ccw(c0,0) 0,-1.97 ; -1.97,0 ccw(c0,0) 0,-1.97 ; -1.97,0 -1.97,4608.28 ; -1.97,4608.28 cw(c0,4608.28) 0,4610.25 ; -1.97,4608.28 cw(c0,4608.28) 0,4610.25 ; 0,-1.97 3071.38,-1.97 ; 0,4610.25 3071.38,4610.25 ; 3071.38,-1.97 ccw(c3071.38,0) 3073.35,0 ; 3071.38,-1.97 ccw(c3071.38,0) 3073.35,0 ; 3071.38,4610.25 cw(c3071.38,4608.28) 3073.35,4608.28 ; 3071.38,4610.25 cw(c3071.38,4608.28) 3073.35,4608.28 ; 3073.35,0 3073.35,4608.28 ; 1.97,1.97 1.97,4606.31 3069.41,4606.31 3069.41,1.97 1.97,1.97
Bottom Component Center:
  lines w10: 2932.81,0 2942.78,9.97 ; 2942.78,0 2952.76,0

## Text inside footprints (layer, text, board x,y; h text height)
U2: Top Overlay "*" at 502.42,2965.97 h50; Top 3D Body "*" at 564.31,2929 h50